# EAGLE board Power Board V1 (EAGLE 7.6.0)
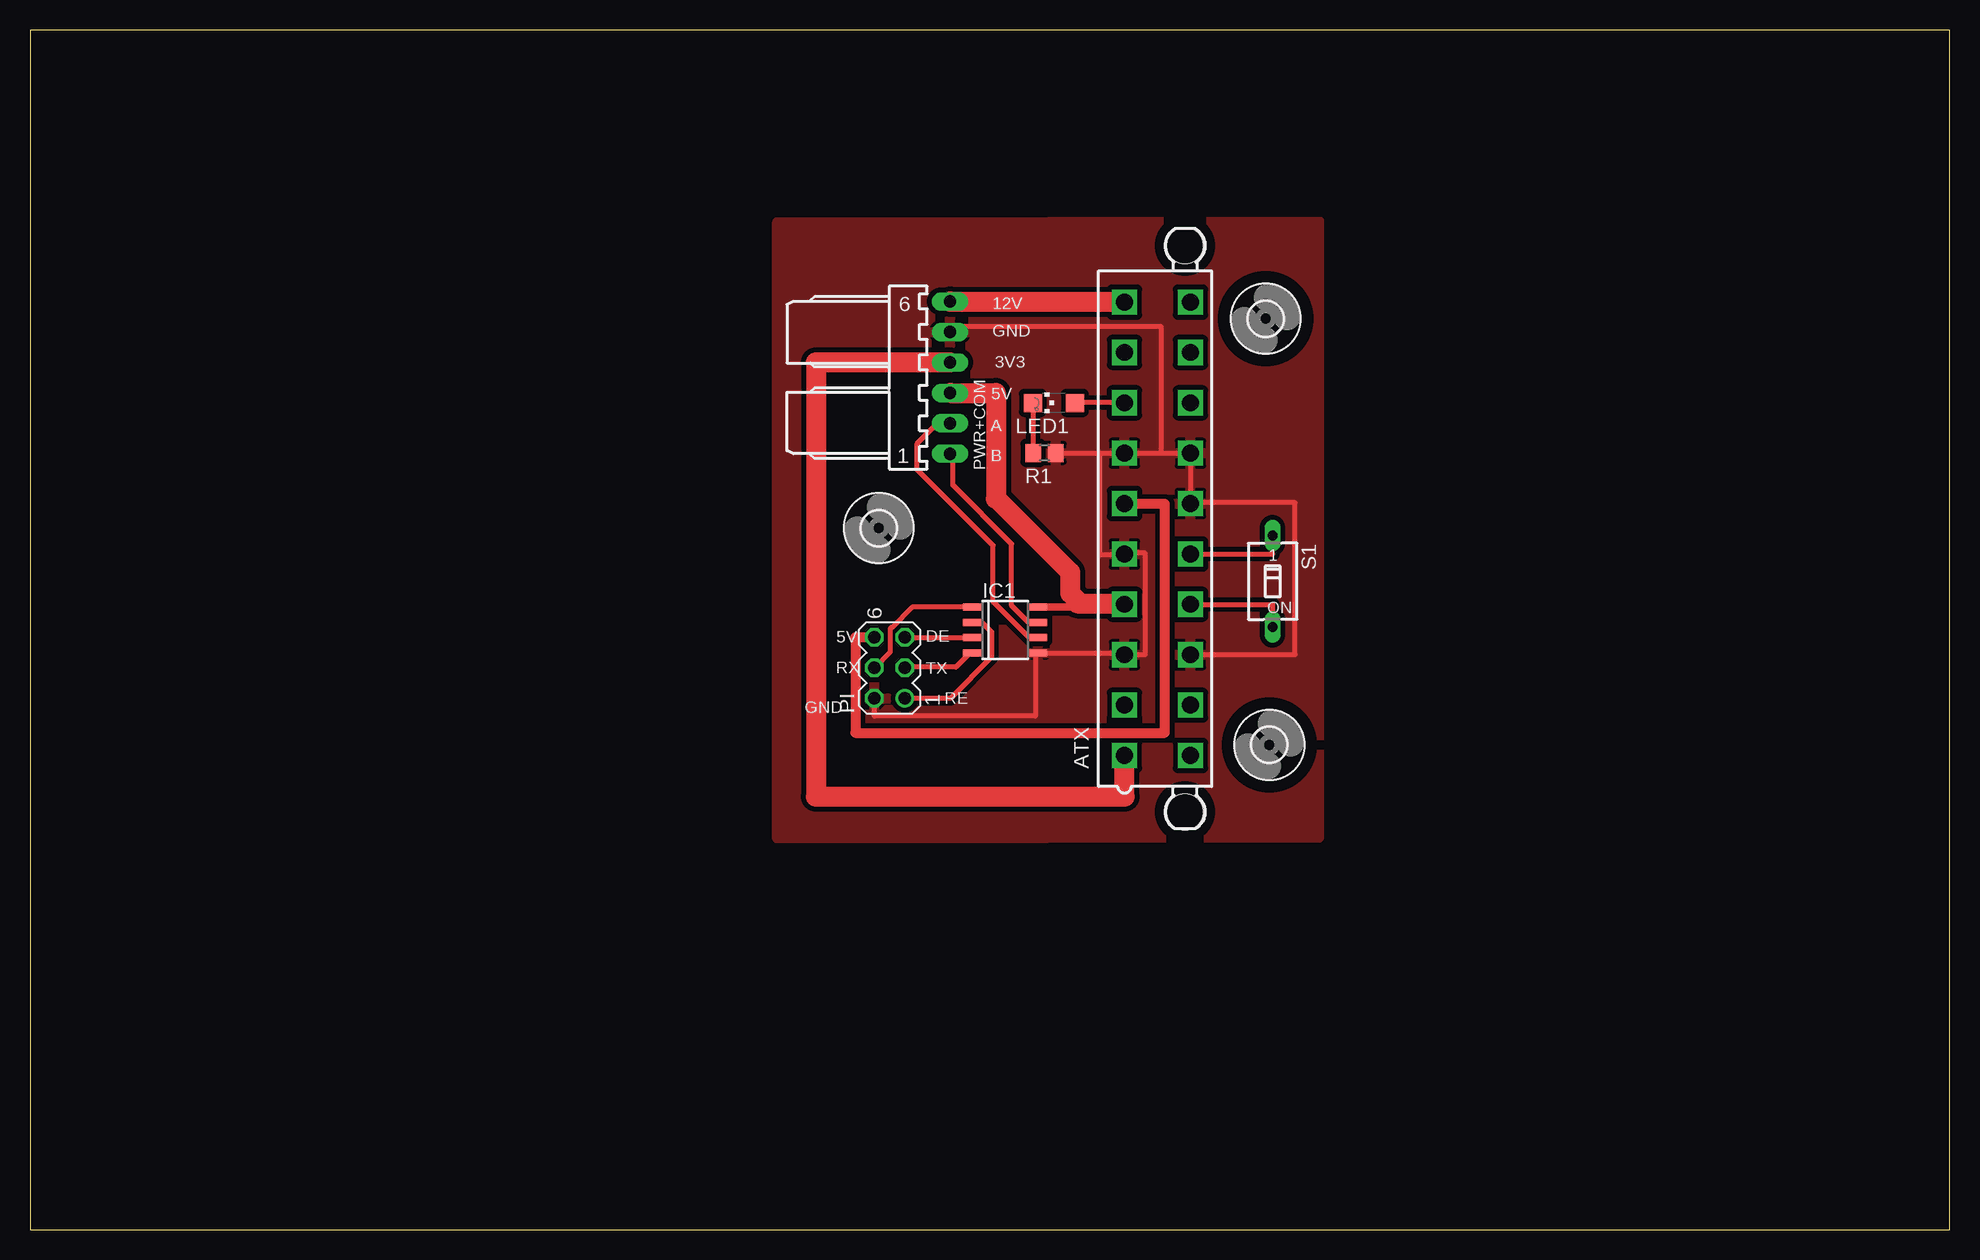
[diagram p0: board, top side]

Size 160 x 100 mm. Coordinates in mm from the lower left corner, seen from the top.
Outline: 0,0 160,0 160,100 0,100 0,0
Copper layers (1*16): Top 0.035mm / dielectric 1.5mm / Bottom 0.035mm
Design rules "default": minimum track width 10mil, minimum drill 24mil, track to track 8mil, track to pad 8mil, pad to pad 8mil, via to via 8mil, smd to smd 8mil, copper to edge 40mil, drill to drill 8mil, minimum pad ring 10mil, minimum via ring 8mil, stop-mask expansion 4mil, vias tented up to drill 0mil, thermal gap 10mil

## Footprints (pad centres in the part's own frame; a part is rotated, then mirrored left to right if it is on the bottom)
5566-20 = drill 1.4 square: 1 18.9,-2.75; 2 14.7,-2.75; 3 10.5,-2.75; 4 6.3,-2.75; 5 2.1,-2.75; 6 -2.1,-2.75; 7 -6.3,-2.75; 8 -10.5,-2.75; 9 -14.7,-2.75; 10 -18.9,-2.75; 11 18.9,2.75; 12 14.7,2.75; 13 10.5,2.75; 14 6.3,2.75; 15 2.1,2.75; 16 -2.1,2.75; 17 -6.3,2.75; 18 -10.5,2.75; 19 -14.7,2.75; 20 -18.9,2.75 | hole 3: 23.6,2.29; -23.6,2.29
D_R-PDSO-G8 = smd 0.6 x 1.5: 1 -1.905,-2.75; 2 -0.635,-2.75; 3 0.635,-2.75; 4 1.905,-2.75; 5 1.905,2.75; 6 0.635,2.75; 7 -0.635,2.75; 8 -1.905,2.75
CHIPLED_1206 = smd 1.5 x 1.5: A 0,-1.75; C 0,1.75
MA03-2 = drill 1.016: 1 -2.54,-1.27 | drill 1.016 octagon: 2 -2.54,1.27; 3 0,-1.27; 4 0,1.27; 5 2.54,-1.27; 6 2.54,1.27
7395-06 = drill 1.016 long: 1 6.35,0; 2 3.81,0; 3 1.27,0; 4 -1.27,0; 5 -3.81,0; 6 -6.35,0
R0805 = smd 1.3 x 1.5: 1 -0.95,0; 2 0.95,0
SD4-01 = drill 0.813 long: 1 0,-3.81; 2 0,3.81
2,8 = hole 2.8: 0,0

## Placement (x,y rotation side)
ATX  5566-20  [5566-20]  93.98,58.42 270 top
IC1  75176AD  [D_R-PDSO-G8]  81.28,49.98 270 top
LED1  RED  [CHIPLED_1206]  85.34,68.91 90 top
PI  [MA03-2]  71.65,46.83 90 top
PWR+COM  22-05-7068-06  [7395-06]  76.69,71.02 270 top
R1  150  [R0805]  84.56,64.74 180 top
S1  [SD4-01]  103.58,54.04 180 top
U$1  [2,8]  103,75.93 0 top
U$2  [2,8]  103.3,40.4 0 top
U$3  [2,8]  70.75,58.47 0 top

## Library data of the parts
ATX PWR+COM = con-molex; OC_FARNELL: unknown; OC_NEWARK: unknown
IC1 = 751xx
LED1 = led
PI = con-lstb; OC_FARNELL: unknown; OC_NEWARK: unknown
R1 = resistor
S1 = switch-dil; OC_FARNELL: unknown; OC_NEWARK: unknown
U$1-U$3 = holes

## Nets
3V3: ATX.1 PWR+COM.4
5V.1: ATX.4 IC1.8 PWR+COM.3
5V.2: ATX.6 PI.6
12V: ATX.10 PWR+COM.6
A: IC1.6 PWR+COM.2
B: IC1.7 PWR+COM.1
DE: IC1.3 PI.5
GND: ATX.3 ATX.5 ATX.7 ATX.13 ATX.16 ATX.17 IC1.5 PI.2 PWR+COM.5 R1.1
N$1: ATX.14 S1.2
N$2: ATX.15 S1.1
N$3: ATX.8 LED1.A
N$4: LED1.C R1.2
RE: IC1.2 PI.1
RX: IC1.1 PI.4
TX: IC1.4 PI.3

## Tracks (layer width: path | path; a pad name or v marks a point on that pad's centre or on a via)
3V3
  Top 1.676: PWR+COM.4 65.5,72.29 65.5,36.1 91.23,36.1 ATX.1
5V.1
  Top 0.61: IC1.8 87.3,51.88 87.3,52.2
  Top 1.676: PWR+COM.3 80.5,69.75 80.5,60.9 80.61,60.9 86.7,54.81 86.7,53.05 87.55,52.2 | 87.3,52.2 87.55,52.2 | 87.55,52.2 91.23,52.2 ATX.4
5V.2
  Top 0.813: PI.6 68.8,49.37 68.8,41.4 94.6,41.4 94.6,60.5 91.23,60.5 ATX.6
12V
  Top 1.676: ATX.10 76.69,77.32 PWR+COM.6
A
  Top 0.406: IC1.6 83.28,49.34 80.28,52.34 80.28,57.03 73.95,63.36 73.95,65.51 75.58,67.14 76.62,67.14 PWR+COM.2
B
  Top 0.406: IC1.7 83.23,50.62 81.83,52.02 81.83,57.15 76.93,62.05 76.93,64.43 PWR+COM.1
DE
  Top 0.406: PI.5 78.53,49.37 IC1.3
GND
  Top 0.406: PI.2 70.38,42.8 83.8,42.8 83.8,48.08 IC1.5 91.23,48.08 ATX.3 92.97,47.92 92.97,56.38 91.23,56.38 ATX.5 91.23,56.28 89.15,56.28 89.15,64.74 R1.1 91.23,64.74 ATX.7 94.27,64.72 | ATX.13 105.45,47.92 105.45,60.59 96.73,60.59 ATX.16 ATX.17 94.27,64.72 | PWR+COM.5 76.85,74.83 76.85,75.3 94.27,75.3 94.27,64.72
  pour Top (isolate 0.406): 62.28,84 107.44,84.08 107.44,32.65 62.28,32.57
N$1
  Top 0.406: ATX.14 103.58,52.12 S1.2
N$2
  Top 0.406: ATX.15 103.58,56.32 S1.1
N$3
  Top 0.406: ATX.8 LED1.A
N$4
  Top 0.406: LED1.C 83.61,68.91 R1.2
RE
  Top 0.406: IC1.2 79.36,50.62 80.15,49.82 80.15,47.71 76.72,44.28 PI.1
RX
  Top 0.406: IC1.1 73.53,51.88 71.84,50.19 71.81,50.19 71.7,50.08 71.7,48.15 PI.4
TX
  Top 0.406: IC1.4 78.36,48.08 77.17,46.89 72.98,46.89 PI.3

## Text on the board
tPlace: 12V | GND | 3V3 | 5V | A | B | 5V | DE | RX | TX | RE | GND